# EAGLE board RILey-PCB_V2.0_v89 (EAGLE 9.7.0)
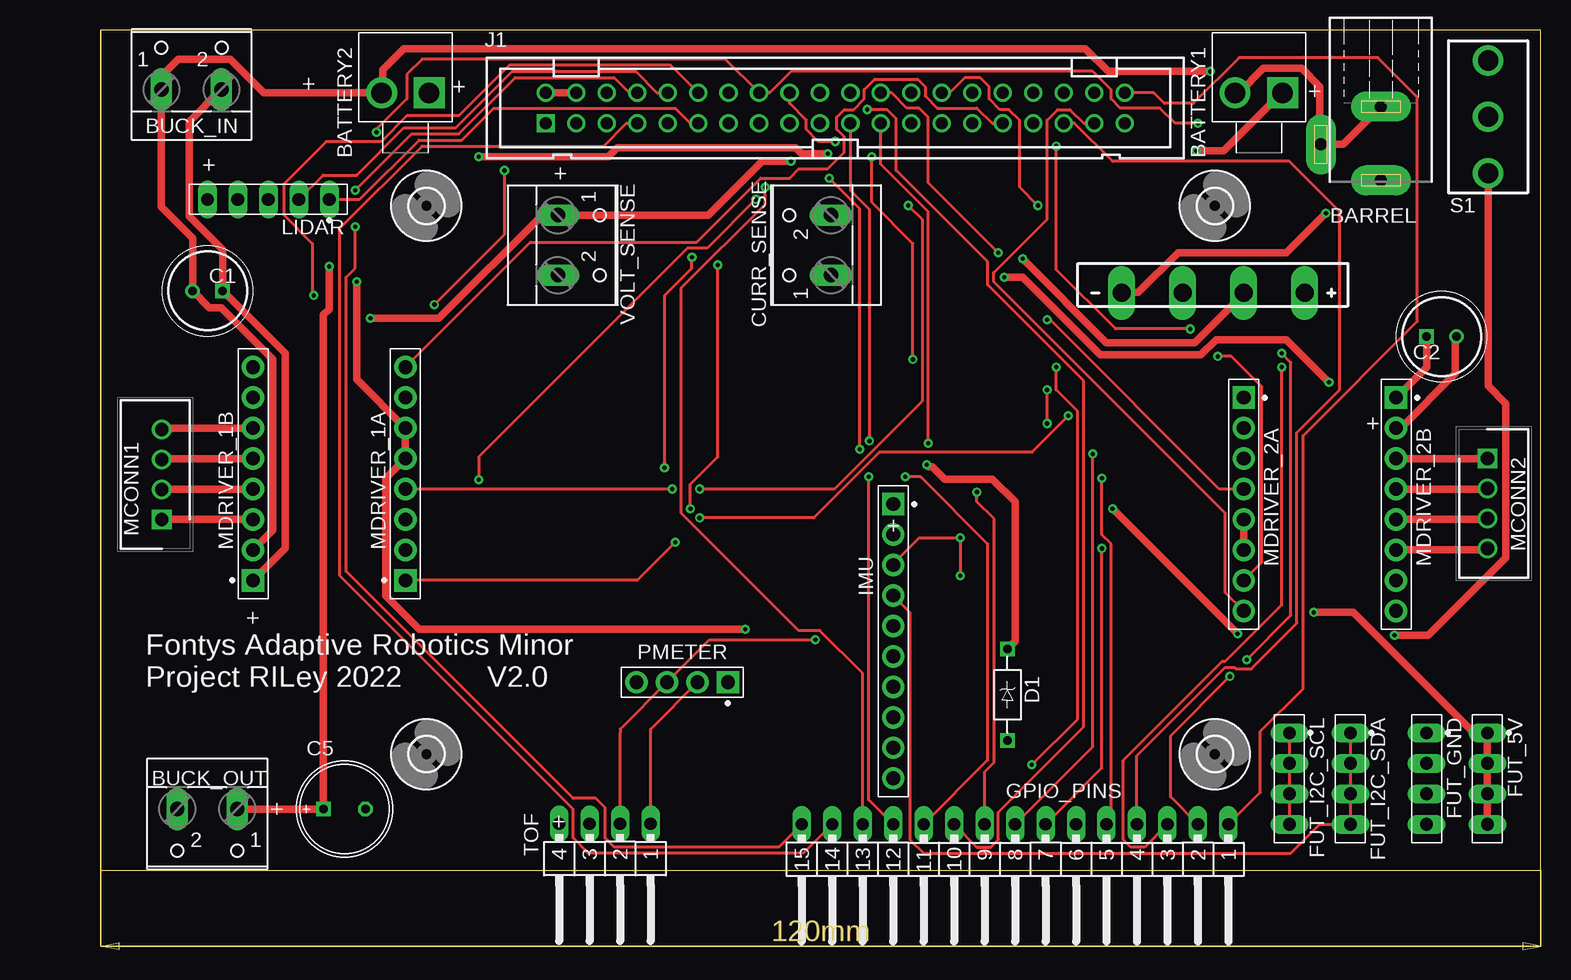
[diagram p0: board, top side]
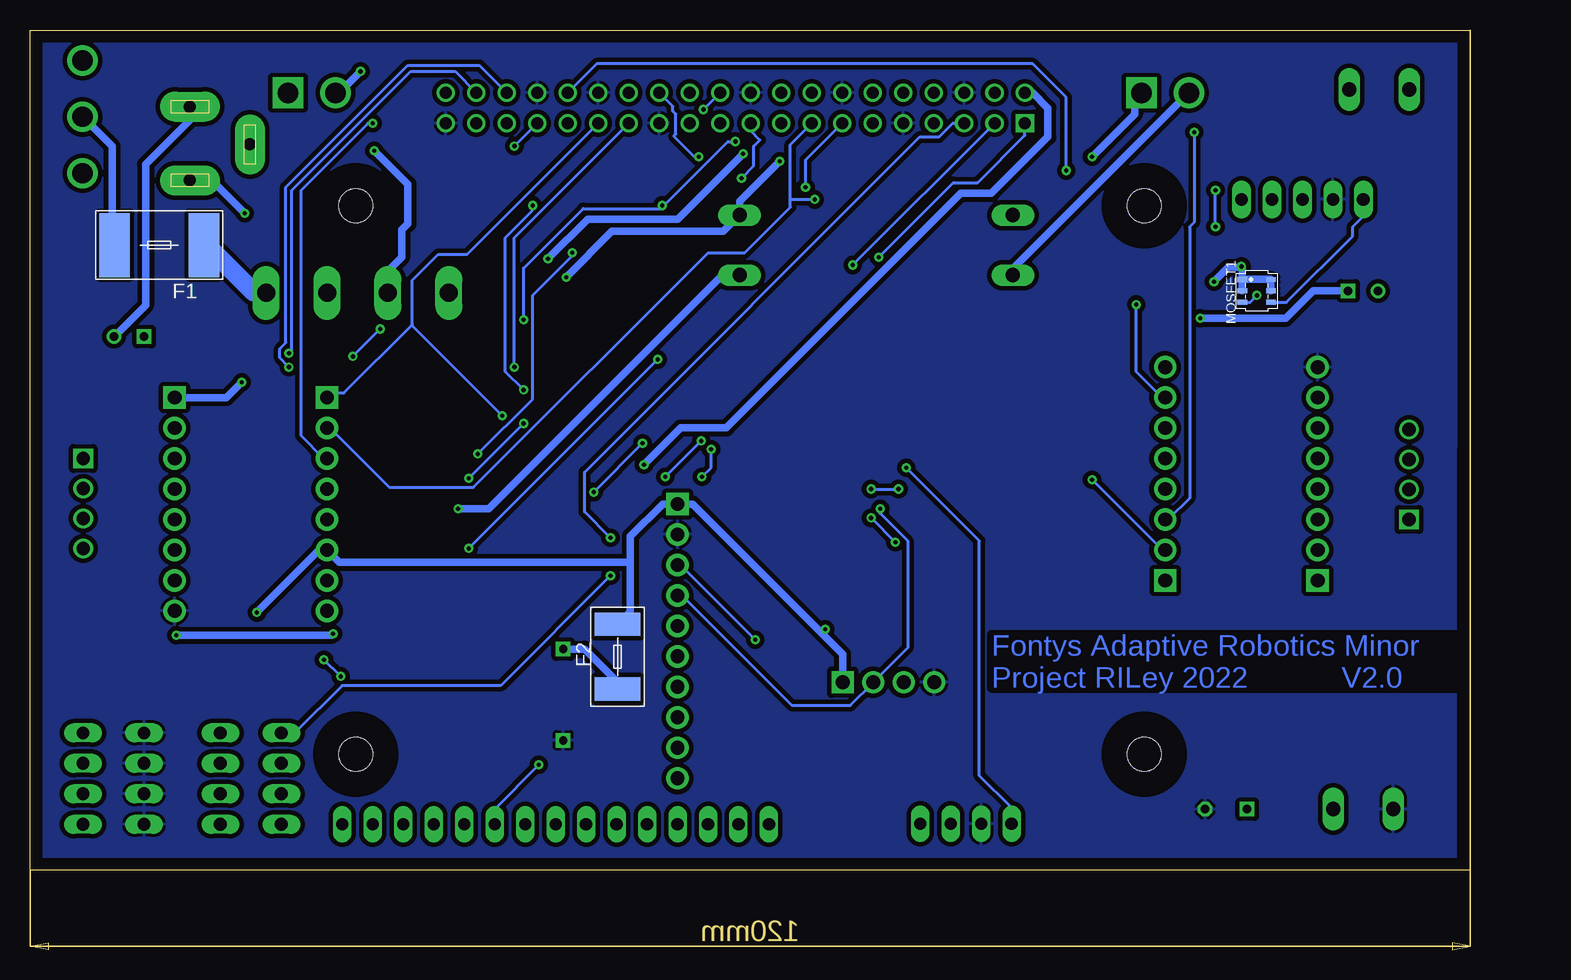
[diagram p1: board, bottom side, seen from below]

Size 120 x 70 mm. Coordinates in mm from the lower left corner, seen from the top.
Outline: 0,0 120,0 120,70 0,70 0,0
Copper layers (1*16): Top 0.035mm / dielectric 1.5mm / Bottom 0.035mm
Design rules "default *": minimum track width 10mil, minimum drill 0.35mm, track to track 10mil, track to pad 10mil, pad to pad 10mil, via to via 10mil, smd to smd 10mil, copper to edge 40mil, drill to drill 6mil, minimum pad ring 10mil, minimum via ring 8mil, stop-mask expansion 4mil, vias tented up to drill 0mil, thermal gap 10mil
Net classes: 1 Power: width 0.635 mm, clearance 0.381 mm; 2 Heavy duty: width 1.524 mm, clearance 0.381 mm

## Footprints (pad centres in the part's own frame; a part is rotated, then mirrored left to right if it is on the bottom)
733980-62 = drill 1 pad 2.5 long: 1 0,8.57; 2 0,2.42; 3 5,5.57
KK41791-4020_2-PIN = drill 1.707 square: 1 -1.981,0 | drill 1.707: 2 1.981,0
W237-102 = drill 1.194 long: 1 -2.5,-1.27; 2 2.5,-1.27
CAPPRD250W50D655H1250 = drill 0.7 pad 1.1 square: 1 0,0 | drill 0.7 pad 1.1: 2 2.5,0
ELECTROLYTIC_CAPACITOR = drill 0.7 square: + -1.75,0 | drill 0.7 octagon: - 1.75,0
ZENER-TH = drill 0.7 square: A -3.81,0; C 3.81,0
DIODE-BRIDGE = drill 1.5 long: 1 -7.62,-0.159; 2 -2.54,-0.159; 3 2.54,-0.159; 4 7.62,-0.159
2920L400/15MR = smd 2.54 x 5.334: 1 -3.731,0; 2 3.731,0
1812L300MR = smd 1.93 x 3.81: 1 -2.699,0; 2 2.699,0
MA04-1_S = drill 1.055 pad 1.583 long: 1 -3.81,0; 2 -1.27,0; 3 1.27,0; 4 3.81,0
MA15-1W = drill 1.016 long: 1 -17.78,0; 2 -15.24,0; 3 -12.7,0; 4 -10.16,0; 5 -7.62,0; 6 -5.08,0; 7 -2.54,0; 8 0,0; 9 2.54,0; 10 5.08,0; 11 7.62,0; 12 10.16,0; 13 12.7,0; 14 15.24,0; 15 17.78,0
FE10-1 = drill 1.155 pad 1.855 square: 1 -11.43,0 | drill 1.155 pad 1.855: 2 -8.89,0; 3 -6.35,0; 4 -3.81,0; 5 -1.27,0; 6 1.27,0; 7 3.81,0; 8 6.35,0; 9 8.89,0; 10 11.43,0
MC-254-40-00-ST-DIP = drill 1 pad 1.422 square: 1 -24.13,-1.27 | drill 1 pad 1.422: 2 -24.13,1.27; 3 -21.59,-1.27; 4 -21.59,1.27; 5 -19.05,-1.27; 6 -19.05,1.27; 7 -16.51,-1.27; 8 -16.51,1.27; 9 -13.97,-1.27; 10 -13.97,1.27; 11 -11.43,-1.27; 12 -11.43,1.27; 13 -8.89,-1.27; 14 -8.89,1.27; 15 -6.35,-1.27; 16 -6.35,1.27; 17 -3.81,-1.27; 18 -3.81,1.27; 19 -1.27,-1.27; 20 -1.27,1.27; 21 1.27,-1.27; 22 1.27,1.27; 23 3.81,-1.27; 24 3.81,1.27; 25 6.35,-1.27; 26 6.35,1.27; 27 8.89,-1.27; 28 8.89,1.27; 29 11.43,-1.27; 30 11.43,1.27; 31 13.97,-1.27; 32 13.97,1.27; 33 16.51,-1.27; 34 16.51,1.27; 35 19.05,-1.27; 36 19.05,1.27; 37 21.59,-1.27; 38 21.59,1.27; 39 24.13,-1.27; 40 24.13,1.27
MA05-1_S = drill 1.055 pad 1.583 long: 1 -5.08,0; 2 -2.54,0; 3 0,0; 4 2.54,0; 5 5.08,0
B4B-XH-A_LF__SN_ = drill 1.1 pad 1.65 square: 1 0,0 | drill 1.1 pad 1.65 slot 1.1: 2 2.5,0 | drill 1.1 pad 1.65: 3 5,0; 4 7.5,0
FE08-1 = drill 1.155 pad 1.855 square: 1 -8.89,0 | drill 1.155 pad 1.855: 2 -6.35,0; 3 -3.81,0; 4 -1.27,0; 5 1.27,0; 6 3.81,0; 7 6.35,0; 8 8.89,0
TSOP6_SOT457 = smd 0.813 x 0.432: D1 -1.191,0.953; D2 -1.191,0; D3 1.191,0; G -1.191,-0.953; S 1.191,-0.953 | smd 0.813 x 0.406: D4 1.191,0.953
FE04-1 = drill 1.155 pad 1.855 square: 1 0,0 | drill 1.155 pad 1.855: 2 2.54,0; 3 5.08,0; 4 7.62,0
1000-SERIES(SPDT) = drill 1.68 pad 2.48: 1 0,-4.7; 2 0,0; 3 0,4.7
MA04-1W = drill 1.016 long: 1 -3.81,0; 2 -1.27,0; 3 1.27,0; 4 3.81,0
2,8 = hole 2.8: 0,0

## Placement (x,y rotation side)
BARREL  DC_BARREL0-62  [733980-62]  106.68,66.04 180 top
BATTERY1  0026604020  [KK41791-4020_2-PIN]  96.52,64.77 180 top
BATTERY2  0026604020  [KK41791-4020_2-PIN]  25.4,64.77 180 top
BUCK_IN  [W237-102]  7.57,66.32 0 top
BUCK_OUT  [W237-102]  8.89,3.81 180 top
C1  100uF  [CAPPRD250W50D655H1250]  10.16,48.26 180 top
C2  100uF  [CAPPRD250W50D655H1250]  110.49,44.45 0 top
C5  [ELECTROLYTIC_CAPACITOR]  20.32,5.08 0 top
CURR_SENSE  [W237-102]  59.59,52.07 90 top
D1  ZENER-THDO-35  [ZENER-TH]  75.56,14.61 90 top
D2  DIODE-BRIGDE  [DIODE-BRIDGE]  92.71,48.26 0 top
F1  2920L400/15MR  [2920L400/15MR]  109.22,52.07 180 bottom
F2  1812L300MR  [1812L300MR]  71.03,17.78 270 bottom
FUT_5V  MA04-1_SMALLPAD  [MA04-1_S]  115.57,7.62 270 top
FUT_GND  MA04-1_SMALLPAD  [MA04-1_S]  110.49,7.62 270 top
FUT_I2C_SCL  MA04-1_SMALLPAD  [MA04-1_S]  99.06,7.62 270 top
FUT_I2C_SDA  MA04-1_SMALLPAD  [MA04-1_S]  104.14,7.62 270 top
GPIO_PINS  MA15-1W  [MA15-1W]  76.2,3.81 180 top
IMU  FE10-1_3D  [FE10-1]  66.04,19.07 270 top
J1  MC-254-40-00-ST-DIP  [MC-254-40-00-ST-DIP]  61.21,63.5 0 top
LIDAR  MA05-1_SMALLPAD  [MA05-1_S]  13.97,55.88 180 top
MCONN1  B4B-XH-A_LF__SN_  [B4B-XH-A_LF__SN_]  5.08,29.21 90 top
MCONN2  B4B-XH-A_LF__SN_  [B4B-XH-A_LF__SN_]  115.57,34.29 270 top
MDRIVER_1A  FE08-1_3D  [FE08-1]  25.4,33.02 90 top
MDRIVER_1B  FE08-1_3D  [FE08-1]  12.7,33.02 90 top
MDRIVER_2A  FE08-1_3D  [FE08-1]  95.25,30.48 270 top
MDRIVER_2B  FE08-1_3D  [FE08-1]  107.95,30.48 270 top
MOSFET1  SI2303CDS-T1-GE3  [TSOP6_SOT457]  17.78,48.26 0 bottom
PMETER  [FE04-1]  52.27,15.65 180 top
S1  1101M2S3CQE2  [1000-SERIES(SPDT)]  115.62,62.76 0 top
TOF  MA04-1W  [MA04-1W]  42.01,3.86 180 top
U$1  [2,8]  27.15,9.65 0 top
U$3  [2,8]  92.85,55.35 0 top
U$4  [2,8]  27.15,55.35 0 top
U$5  [2,8]  92.85,9.65 0 top
VOLT_SENSE  [W237-102]  39.37,52.07 270 top

## Library data of the parts
BARREL D2 MOSFET1 = Custom parts
BATTERY1 BATTERY2 = Molex; CATEGORY: Connectors, Interconnects; COLOR: Natural; CONNECTOR_TYPE: Header, Unshrouded; CONTACT_FINISH: Tin; CONTACT_FINISH_THICKNESS: 60µin (1.52µm); CONTACT_MATING_LENGTH: 0.450" (11.43mm); CONTACT_TYPE: Male Pin; DESCRIPTION: CONN HEADER 2POS .156 VERT TIN; DOCUMENTATION_LINK: <a href="http://www.molex.com/pdm_docs/sd/026604020_sd.pdf">Datasheet</a>; DOCUMENTATION_URL: http://www.molex.com/pdm_docs/sd/026604020_sd.pdf; FAMILY: Rectangular Connectors - Headers, Male Pins; FASTENING_TYPE: Friction Lock; FEATURES: -; MANUFACTURER: Molex Inc; MOUNTING_TYPE: Through Hole; NUMBER_OF_POSITIONS: 2; NUMBER_OF_POSITIONS_LOADED: All; NUMBER_OF_ROWS: 1; PART_NUMBER: 0026604020; PITCH: 0.156" (3.96mm); ROW_SPACING: -; SERIES: KK® 41791; SUPPLIER_ITEM_LINK: <a href="http://www.digikey.com/product-search/en?KeyWords=0026604020&WT.z_header=search_go">Details</a>; SUPPLIER_ITEM_NUMBER: WM4620-ND; SUPPLIER_ITEM_URL: http://www.digikey.com/product-search/en?KeyWords=0026604020&WT.z_header=search_go; SUPPLIER_LINK: <a href="http://www.digikey.com">Home Page</a>; SUPPLIER_NAME: Digi-Key; SUPPLIER_URL: http://www.digikey.com; TERMINATION: Solder
BUCK_IN BUCK_OUT CURR_SENSE VOLT_SENSE = con-wago-500; MPN: 237-102; OC_FARNELL: unknown; OC_NEWARK: 70K9898
C1 C2 = Capacitors; ALLIED_NUMBER: 70187653; DESCRIPTION: Al electrolytic cap,PS,25V,100 F Nichicon 100uF 25 V dc Aluminium Electrolytic Capacitor, PS Series 2000h 6.3 (Dia.) x 11mm; HEIGHT: 12.5mm; MANUFACTURER_NAME: Nichicon; MANUFACTURER_PART_NUMBER: UPS1E101MED; RS_PART_NUMBER: 5194059P; RS_PRICE-STOCK: http://uk.rs-online.com/web/p/products/5194059P
C5 = Capacitors
D1 = Diodes
F1 F2 = Fuses
FUT_5V FUT_GND FUT_I2C_SCL FUT_I2C_SDA LIDAR = Male_Headers
GPIO_PINS TOF = Male-Pinheaders
IMU MDRIVER_1A MDRIVER_1B MDRIVER_2A MDRIVER_2B PMETER = Female_Headers
J1 = Custom parts; DESCRIPTION: CONNECTOR, HEADER, 40POS, 2ROW, 2.54MM; Pitch Spacing:2.54mm; No. of Contacts:40Contacts; Gender:Header; Product Range:-; Contact Termination Type:Through Hole; No. of Rows:2Rows; Contact Plating:Gold Plated Contacts RoHS Compliant: Yes; HEIGHT: 9.1mm; MANUFACTURER_NAME: MULTICOMP; MANUFACTURER_PART_NUMBER: MC-254-40-00-ST-DIP
MCONN1 MCONN2 = Custom parts; DESCRIPTION: XH-2.5mm Header top entry 4 way JST XH Series, Series Number B4B, 2.5mm Pitch 4 Way 1 Row Straight PCB Header, Solder Termination, 3A; HEIGHT: 7mm; MANUFACTURER_NAME: JST (JAPAN SOLDERLESS TERMINALS); MANUFACTURER_PART_NUMBER: B4B-XH-A(LF)(SN)
S1 = SamacSys_Parts; ALLIED_NUMBER: 70128282; DESCRIPTION: 1101M2S3CQE2 (Slide Switches); HEIGHT: mm; MANUFACTURER_NAME: C & K COMPONENTS; MANUFACTURER_PART_NUMBER: 1101M2S3CQE2; RS_PART_NUMBER: 1617340; RS_PRICE-STOCK: http://uk.rs-online.com/web/p/products/1617340
U$1 U$3-U$5 = holes

## Nets
0V [Power]: BARREL.2 BARREL.3 BATTERY1.2 BATTERY2.2 BUCK_IN.1 C1.2 C2.2 MDRIVER_1B.2 MDRIVER_2B.2 VOLT_SENSE.2
+3_V: J1.17
+3V: J1.1 TOF.4
+5V [Power]: BUCK_OUT.1 C5.+ F2.1 FUT_5V.1 FUT_5V.2 FUT_5V.3 FUT_5V.4 IMU.1 MDRIVER_1A.5 MDRIVER_1A.6 MDRIVER_2A.5 MDRIVER_2A.6 MOSFET1.D1 MOSFET1.D2 MOSFET1.D3 MOSFET1.D4 PMETER.1
+5V_FUSED [Power]: D1.C F2.2 J1.2 J1.4
+12V [Power]: BUCK_IN.2 C1.1 C2.1 CURR_SENSE.2 MDRIVER_1B.1 MDRIVER_2B.1 VOLT_SENSE.1
+BAT [Power]: CURR_SENSE.1 S1.1
+BAT1 [Power]: BATTERY1.1 D2.2
+BAT2 [Power]: BATTERY2.1 D2.3
+IN [Power]: BARREL.1 D2.1
GND [Power]: BUCK_OUT.2 C5.- D1.A FUT_GND.1 FUT_GND.2 FUT_GND.3 FUT_GND.4 IMU.2 J1.6 J1.9 J1.14 J1.20 J1.25 J1.30 J1.34 J1.39 LIDAR.4 MDRIVER_1B.8 MDRIVER_2B.8 PMETER.4 TOF.3
GPIO0: GPIO_PINS.6 J1.27
GPIO1: GPIO_PINS.5 J1.28
GPIO4: GPIO_PINS.14 J1.7
GPIO7: GPIO_PINS.7 J1.26
GPIO8: GPIO_PINS.8 J1.24
GPIO9: GPIO_PINS.11 J1.21
GPIO10: GPIO_PINS.12 J1.19
GPIO11: GPIO_PINS.9 J1.23
GPIO16: GPIO_PINS.3 J1.36
GPIO19: GPIO_PINS.4 J1.35
GPIO20: GPIO_PINS.2 J1.38
GPIO21: GPIO_PINS.1 J1.40
GPIO25: GPIO_PINS.10 J1.22
GPIO27: GPIO_PINS.13 J1.13
I2C_SCL: FUT_I2C_SCL.1 FUT_I2C_SCL.2 FUT_I2C_SCL.3 FUT_I2C_SCL.4 IMU.3 J1.5 PMETER.3 TOF.2
I2C_SDA: FUT_I2C_SDA.1 FUT_I2C_SDA.2 FUT_I2C_SDA.3 FUT_I2C_SDA.4 IMU.4 J1.3 PMETER.2 TOF.1
IN [Heavy duty]: D2.4 F1.1
LID_ENABLE: J1.12 MOSFET1.G
M_DISABLE: J1.29 MDRIVER_1A.1 MDRIVER_2A.1
M_MODE0: J1.15 MDRIVER_1A.2 MDRIVER_2A.2
M_MODE1: J1.16 MDRIVER_1A.3 MDRIVER_2A.3
M_MODE2: J1.18 MDRIVER_1A.4 MDRIVER_2A.4
MD1_DIR: J1.31 MDRIVER_1A.8
MD1_STEP: J1.32 MDRIVER_1A.7
MD2_DIR: J1.37 MDRIVER_2A.8
MD2_STEP: J1.33 MDRIVER_2A.7
N$1: LIDAR.5 MOSFET1.S
N$3 [Power]: F1.2 S1.2
N$4 [Power]: MCONN1.1 MDRIVER_1B.3
N$5 [Power]: MCONN1.2 MDRIVER_1B.4
N$6 [Power]: MCONN1.3 MDRIVER_1B.5
N$7 [Power]: MCONN1.4 MDRIVER_1B.6
N$8 [Power]: MCONN2.1 MDRIVER_2B.3
N$9 [Power]: MCONN2.2 MDRIVER_2B.4
N$10 [Power]: MCONN2.3 MDRIVER_2B.5
N$11 [Power]: MCONN2.4 MDRIVER_2B.6
PWM_LID: J1.11 LIDAR.1
RX_UART: J1.10 LIDAR.2
TX_UART: GPIO_PINS.15 J1.8

## Tracks (layer width: path | path; a pad name or v marks a point on that pad's centre or on a via)
0V  (via drill 0.35)
  Top 0.635: MDRIVER_2B.2 108.33,36.83 112.9,41.4 112.9,44.45 C2.2 | BATTERY1.2 94.87,64.77 96.9,66.8 100.08,66.8 101.6,65.28 101.6,60.55 BARREL.3 103.53,60.47 BARREL.2 | MDRIVER_1B.2 14.35,28.32 14.35,42.56 10.05,46.86 9.06,46.86 C1.2 7.66,52.66 5.07,55.26 BUCK_IN.1 5.07,66.16 6.48,67.56 10.79,67.56 13.59,64.77 BATTERY2.2 23.5,64.85 23.5,66.67 25.27,68.45 82.04,68.45 83.95,66.55 v92.46,66.55
  Bottom 0.635: BARREL.2 106.68,62.48 110.36,58.8 110.36,47.08 C2.2 | BATTERY1.2 94.23,64.77 v92.46,66.55 | BATTERY2.2 38.1,50.09 VOLT_SENSE.2
+3V  (via drill 0.35)
  Top 0.254: v49.28,51.05 49.28,50.16 46.99,47.88 v46.99,33.53
  Bottom 0.254: J1.1 37.08,61.21 41.02,57.28 43.05,57.28 v49.28,51.05 | v46.99,33.53 40.89,27.43 40.89,7.87 38.2,5.18 TOF.4
+5V  (via drill 0.35)
  Top 0.635: BUCK_OUT.1 C5.+ 18.57,46.26 19.05,46.74 v19.05,50.29 | v21.34,49.02 21.34,40.89 MDRIVER_1A.6 MDRIVER_1A.5 23.75,32.64 23.75,22.86 26.54,20.07 v53.72,20.07 | MDRIVER_2A.5 MDRIVER_2A.6 | FUT_5V.4 FUT_5V.3 FUT_5V.2 FUT_5V.1 114.43,11.43 104.39,21.46 v101.09,21.46
  Bottom 0.635: 54.04,19.75 64.79,30.5 IMU.1 67.29,30.5 69.98,27.81 69.98,25.65 | 54.04,19.75 52.27,17.98 PMETER.1 | v101.09,21.46 95.89,26.67 MDRIVER_2A.6 94.23,25.65 69.98,25.65 | v53.72,20.07 54.04,19.75 | 69.98,25.65 69.98,21.53 F2.1 | MOSFET1.D3 MOSFET1.D4 MOSFET1.D1 | MOSFET1.D2 MOSFET1.D1 | MOSFET1.D1 18.97,50.21 | 18.97,50.21 v19.05,50.29 | v21.34,49.02 20.14,50.21 18.97,50.21
+5V_FUSED  (via drill 0.35)
  Top 0.635: J1.4 J1.2 | D1.C 76.2,19.05 76.2,30.67 74.3,32.57 70.32,32.57 69.3,33.59 69.03,33.59 v68.83,33.78
  Bottom 0.635: D1.C 73.79,18.41 71.03,15.66 F2.2 | J1.2 36.45,64.77 35.18,63.5 35.18,61.09 39.88,56.39 42.42,56.39 61.97,36.83 65.78,36.83 v68.83,33.78
+12V  (via drill 0.35)
  Top 0.635: MDRIVER_1B.1 15.37,26.8 15.37,43.05 C1.1 10.16,51.69 7.37,54.48 7.37,62.35 BUCK_IN.2 | C2.1 110.49,41.91 MDRIVER_2B.1 | v57.53,59.05 55.12,59.05 50.63,54.57 VOLT_SENSE.1 36.79,54.57 28.19,45.97 v22.48,45.97 | v102.36,40.64 98.81,44.2 92.96,44.2 91.69,42.93 83.31,42.93 76.83,49.4 v75.31,49.4
  Bottom 0.635: v57.53,59.05 60.86,55.73 CURR_SENSE.2 62.22,53.21 71.5,53.21 v75.31,49.4 | MDRIVER_2B.1 103.63,39.37 v102.36,40.64 | C1.1 13.08,48.26 15.37,45.97 v22.48,45.97
+BAT  (via drill 0.35)
  Top 0.635: v94.74,19.68 v84.33,30.1 | v107.82,19.56 110.62,19.56 117.09,26.04 117.09,38.86 115.62,40.34 S1.1
  Bottom 0.635: v84.33,30.1 81.79,30.1 62.32,49.57 CURR_SENSE.1 | v94.74,19.68 94.87,19.56 v107.82,19.56
+BAT1  (via drill 0.35)
  Top 0.635: v91.31,59.94 93.6,59.94 98.42,64.77 BATTERY1.1
  Bottom 0.635: D2.2 90.17,49.91 89.03,51.05 89.03,53.34 88.52,53.85 88.52,57.15 v91.31,59.94
+BAT2  (via drill 0.35)
  Top 0.635: v76.83,50.93 83.82,43.94 91.19,43.94 95.25,48.01 D2.3 | v60.58,59.69 58.42,59.69 57.91,60.2 43.05,60.2 42.29,59.44 v31.5,59.44
  Bottom 0.635: v76.83,50.93 73.53,54.23 66.04,54.23 v60.58,59.69 | v31.5,59.44 27.94,62.99 27.94,64.26 27.43,64.77 BATTERY2.1
+IN  (via drill 0.35)
  Top 0.635: v102.11,54.74 98.81,51.44 89.79,51.44 86.49,48.13 85.09,48.13 D2.1
  Bottom 0.635: v102.11,54.74 104.78,57.4 106.68,57.4 BARREL.1
GND
  pour Bottom: 0,0 120.02,0 120.02,69.98 0,69.98
GPIO0  (via drill 0.35)
  Top 0.254: v79.63,41.91 79.63,40.01 81.41,38.23 81.41,12.57 v77.6,8.76
  Bottom 0.254: J1.27 79.63,52.7 v79.63,41.91 | v77.6,8.76 81.28,5.08 GPIO_PINS.6
GPIO1  (via drill 0.35)
  Top 0.254: J1.28 70.74,64.77 72.01,66.04 73.28,66.04 74.04,65.28 74.04,64.26 74.93,63.37 75.69,63.37 76.58,62.48 76.58,56.9 v78.11,55.37 | v78.87,37.21 v78.87,40.01 | v83.44,32.64 83.44,27.94 84.2,27.18 84.2,4.19 GPIO_PINS.5
  Bottom 0.254: v78.11,55.37 78.11,54.99 80.39,52.7 80.39,41.53 v78.87,40.01 | v83.44,32.64 v78.87,37.21
GPIO4
  Top 0.254: J1.7 43.81,62.23 41.91,60.33 26.8,60.33 19.94,53.47 19.94,24.51 39.37,5.08 39.37,2.67 40.64,1.4 58.55,1.4 GPIO_PINS.14
GPIO7  (via drill 0.35)
  Top 0.254: v64.26,59.44 64.26,55.63 67.69,52.2 v67.69,42.55 | v83.44,26.8 83.44,8.51 GPIO_PINS.7
  Bottom 0.254: J1.26 66.42,63.63 66.42,63.25 66.17,62.99 66.17,61.34 66.29,61.21 66.29,61.09 64.64,59.44 v64.26,59.44 | v67.69,42.55 v83.44,26.8
GPIO8  (via drill 0.35)
  Top 0.254: J1.24 65.91,64.77 67.18,63.5 68.2,63.5 68.96,62.74 68.96,57.28 v74.8,51.44 | v82.68,34.67 82.68,10.29 GPIO_PINS.8
  Bottom 0.254: v74.8,51.44 74.8,51.18 78.11,47.88 78.11,39.24 v82.68,34.67
GPIO9  (via drill 0.35)
  Top 0.254: J1.21 62.48,56.64 64.06,55.06 v64.06,35.76 | v67.06,32.77 68.33,32.77 73.94,27.15 73.94,9.18 GPIO_PINS.11
  Bottom 0.254: v67.06,32.77 v64.06,35.76
GPIO10  (via drill 0.35)
  Top 0.254: v60.71,57.66 63.25,55.12 v63.25,35.05 | v64.01,32.77 64.01,5.84 GPIO_PINS.12
  Bottom 0.254: J1.19 59.94,61.59 59.18,60.83 59.69,60.33 59.69,58.67 v60.71,57.66 | v63.25,35.05 63.25,33.53 v64.01,32.77
GPIO11  (via drill 0.35)
  Top 0.254: J1.23 65.02,58.8 68.96,54.86 v68.96,35.56 | GPIO_PINS.9 73.66,8.17 74.45,8.96 74.45,29.26 73.03,30.69 v73.03,31.5
  Bottom 0.254: v68.96,35.56 v73.03,31.5
GPIO16  (via drill 0.35)
  Top 0.254: v98.42,41.91 98.42,22.1 93.73,17.4 93.47,17.4 85.22,9.14 85.22,2.54 85.85,1.91 87,1.91 GPIO_PINS.3
  Bottom 0.254: J1.36 82.55,67.06 88.52,67.06 98.68,56.9 98.68,43.94 99.19,43.43 99.19,42.67 v98.42,41.91
GPIO19
  Top 0.254: J1.35 81.15,62.23 84.33,59.05 99.06,59.05 103.25,54.86 103.25,40.01 99.69,36.45 99.69,20.57 95.89,16.76 94.61,16.76 94.49,16.89 93.73,16.89 86.36,9.53 GPIO_PINS.4
GPIO20  (via drill 0.35)
  Top 0.254: v98.42,43.05 99.19,42.29 99.19,21.21 v95.5,17.53 | v94.11,16.13 89.15,11.18 89.15,6.1 GPIO_PINS.2
  Bottom 0.254: J1.38 84.58,66.55 88.27,66.55 98.17,56.64 98.17,43.31 v98.42,43.05 | v94.11,16.13 v95.5,17.53
GPIO21
  Top 0.254: J1.40 87.76,64.77 88.65,63.88 91.06,63.88 94.87,67.69 106.43,67.69 109.73,64.39 109.73,45.72 100.2,36.2 100.2,15.11 96.65,11.56 96.65,6.48 GPIO_PINS.1
GPIO25  (via drill 0.35)
  Top 0.254: v63.88,63.37 65.53,63.37 66.29,62.61 66.29,58.29 73.91,50.67 73.91,48.77 81.92,40.77 81.92,11.94 74.8,4.83 74.8,2.54 74.17,1.91 73.03,1.91 GPIO_PINS.10
  Bottom 0.254: v63.88,63.37 J1.22
GPIO27  (via drill 0.35)
  Top 0.254: v55.37,56.9 55.37,55.5 48.39,48.51 48.39,29.72 58.17,19.94 59.94,19.94 63.5,16.38 GPIO_PINS.13
  Bottom 0.254: J1.13 55.37,59.18 v55.37,56.9
I2C_SCL  (via drill 0.35)
  Top 0.254: FUT_I2C_SCL.4 FUT_I2C_SCL.3 FUT_I2C_SCL.2 FUT_I2C_SCL.1 | IMU.3 66.04,25.53 68.2,27.69 v71.63,27.69 v71.63,24.51 | v59.56,19.18 50.72,19.18 PMETER.3 43.28,11.73 43.28,11.43 TOF.2
  Bottom 0.254: FUT_I2C_SCL.1 97.92,11.43 93.98,15.37 80.77,15.37 v71.63,24.51 | v59.56,19.18 65.79,25.4 66.04,25.4 IMU.3 | J1.5 43.1,62.23 44.23,61.09 45.84,61.09 73.78,33.15 73.78,29.84 v71.63,27.69
I2C_SDA  (via drill 0.35)
  Top 0.254: FUT_I2C_SDA.1 FUT_I2C_SDA.2 FUT_I2C_SDA.3 FUT_I2C_SDA.4 101.6,3.81 99.19,1.4 68.58,1.4 67.44,2.54 67.44,21.46 66.04,22.86 IMU.4 | v51.44,50.42 51.44,34.42 49.15,32.13 v49.15,30.1 | TOF.1 45.82,11.73 PMETER.2
  Bottom 0.254: v51.44,50.42 J1.3 | v49.15,30.1 49.15,29.72 46.86,27.43 46.86,18.52 PMETER.2 49.73,15.61 51.63,13.72 56.52,13.72 65.66,22.86 66.04,22.86 IMU.4
IN
  Bottom 1.524: D2.4 100.33,48.13 101.35,48.13 105.28,52.07 F1.1
LID_ENABLE  (via drill 0.35)
  Top 0.254: J1.12 47.5,67.06 34.04,67.06 29.84,62.87 25.53,62.87 23.37,60.71 18.8,60.71 15.24,57.15 15.24,54.61 17.65,52.2 17.65,47.98 v17.75,47.88
  Bottom 0.254: MOSFET1.G 18.33,47.31 v17.75,47.88
M_DISABLE  (via drill 0.35)
  Top 0.254: MDRIVER_1A.1 44.7,24.13 v47.88,27.3 | v49.91,29.34 59.44,29.34 64.9,34.8 77.6,34.8 v80.64,37.85
  Bottom 0.254: J1.29 83.57,51.31 85.98,51.31 88.14,49.15 88.14,45.47 88.2,45.4 | 88.2,45.4 93.85,39.75 94.87,39.75 MDRIVER_2A.1 | v49.91,29.34 v47.88,27.3 | 88.2,45.4 v80.64,37.85
M_MODE0  (via drill 0.35)
  Top 0.254: v31.5,32.51 31.5,34.42 48.9,51.82 50.55,51.82 v54.61,55.88
  Bottom 0.254: J1.15 56.64,60.45 56.64,55.88 | 56.64,55.88 56.64,55.24 60.45,51.44 63.5,51.44 83.06,31.88 90.04,31.88 95,36.83 MDRIVER_2A.2 | MDRIVER_1A.2 25.65,26.67 v31.5,32.51 | 56.64,55.88 v54.61,55.88
M_MODE1  (via drill 0.35)
  Top 0.254: v91.44,62.23 89.53,62.23 88.27,63.5 84.96,63.5 84.2,64.26 84.2,65.02 82.68,66.55 57.53,66.55 55.75,64.77 J1.16 52.07,67.56 26.8,67.56 25.53,66.29 25.53,64.26 22.99,61.72 v22.99,61.47
  Bottom 0.254: v91.44,62.23 91.82,62.23 97.41,56.64 97.41,36.2 95.5,34.29 MDRIVER_2A.3 | MDRIVER_1A.3 25.15,29.21 23.37,30.99 23.37,53.59 22.99,53.98 v22.99,61.47
M_MODE2  (via drill 0.35)
  Top 0.254: J1.18 57.4,63.88 58.8,62.48 58.8,61.72 59.82,60.71 v61.21,60.71 | v78.87,45.85 79.12,45.85 93.22,31.75 MDRIVER_2A.4 | v47.62,31.75 MDRIVER_1A.4 | v67.31,55.37 68.45,54.23 68.45,39.07 61.13,31.75 v49.91,31.75
  Bottom 0.254: v61.21,60.71 61.85,60.71 67.25,55.31 | 67.25,55.31 67.44,55.12 73.91,55.12 78.87,50.16 v78.87,45.85 | v49.91,31.75 v47.62,31.75 | v67.31,55.37 67.25,55.31
MD1_DIR
  Top 0.254: J1.31 74.3,62.23 73.03,63.5 69.72,63.5 68.71,64.52 68.71,65.28 68.07,65.91 64.52,65.91 63.63,65.02 63.63,64.26 62.74,63.37 61.98,63.37 61.34,62.74 61.34,61.72 61.98,61.09 61.98,59.82 60.58,58.42 58.17,58.42 57.4,57.66 54.99,57.66 49.66,52.32 35.81,52.32 MDRIVER_1A.8
MD1_STEP  (via drill 0.35)
  Top 0.254: v33.66,58.29 33.66,52.96 v27.81,47.12
  Bottom 0.254: J1.32 72.77,67.18 36.45,67.18 33.66,64.39 v33.66,58.29 | v27.81,47.12 27.81,41.53 25.65,39.37 MDRIVER_1A.7
MD2_DIR
  Top 0.254: J1.37 81.92,62.23 80.77,63.37 79.76,63.37 78.87,62.48 78.87,54.23 74.42,49.78 74.42,49.02 93.73,29.72 93.73,23.11 MDRIVER_2A.8
MD2_STEP  (via drill 0.35)
  Top 0.254: v79.63,60.33 79.63,50.04 84.58,45.09 v90.81,45.09 | v93.09,42.8 94.23,42.8 96.77,40.26 96.77,25.65 MDRIVER_2A.7
  Bottom 0.254: v79.63,60.33 J1.33 | v93.09,42.8 v90.81,45.09
N$1
  Bottom 0.254: LIDAR.5 8.89,54.48 9.78,53.59 9.78,52.83 15.3,47.31 MOSFET1.S
N$3
  Bottom 0.635: 113.03,52.07 113.16,52.2 113.16,60.3 S1.2
  Bottom 1.524: F1.2 113.03,52.07
N$4
  Top 0.635: MDRIVER_1B.3 MCONN1.1
N$5
  Top 0.635: MDRIVER_1B.4 5.08,31.75 MCONN1.2
N$6
  Top 0.635: MDRIVER_1B.5 5.08,34.29 MCONN1.3
N$7
  Top 0.635: MDRIVER_1B.6 5.08,36.83 MCONN1.4
N$8
  Top 0.635: MDRIVER_2B.3 MCONN2.1
N$9
  Top 0.635: MDRIVER_2B.4 115.57,31.75 MCONN2.2
N$10
  Top 0.635: MDRIVER_2B.5 115.57,29.21 MCONN2.3
N$11
  Top 0.635: MDRIVER_2B.6 115.57,26.67 MCONN2.4
PWM_LID
  Top 0.254: J1.11 49.15,62.23 47.88,63.5 32.77,63.5 30.1,60.83 26.54,60.83 21.59,55.88 LIDAR.1
RX_UART
  Top 0.254: J1.10 46.35,64.77 44.58,66.55 34.29,66.55 29.59,61.85 25.27,61.85 21.34,57.91 18.54,57.91 LIDAR.2
TX_UART  (via drill 0.35)
  Top 0.254: J1.8 44.07,64.77 42.8,66.04 34.54,66.04 29.84,61.34 25.91,61.34 v21.21,56.64 | v21.21,53.59 21.21,50.16 20.45,49.4 20.45,24.89 39.37,5.97 41.27,5.97 42.04,5.21 42.04,2.67 42.8,1.91 56.52,1.91 GPIO_PINS.15
  Bottom 0.254: v21.21,53.59 v21.21,56.64

## Text on the board
Bottom: Fontys Adaptive Robotics Minor / Project RILey 2022 V2.0
tNames: + | + | + | + | + | + | + | + | Fontys Adaptive Robotics Minor / Project RILey 2022 V2.0 | + | +